# Altium PCB PCB1.PcbDoc
Units mil, origin at the board's own origin, x right, y up, seen from the top; angles counter-clockwise.
Board outline 6000 x 4000 mil, 2 copper layers (Top Layer, Bottom Layer); 25 components, 20 nets, 80 pads, 8 vias.
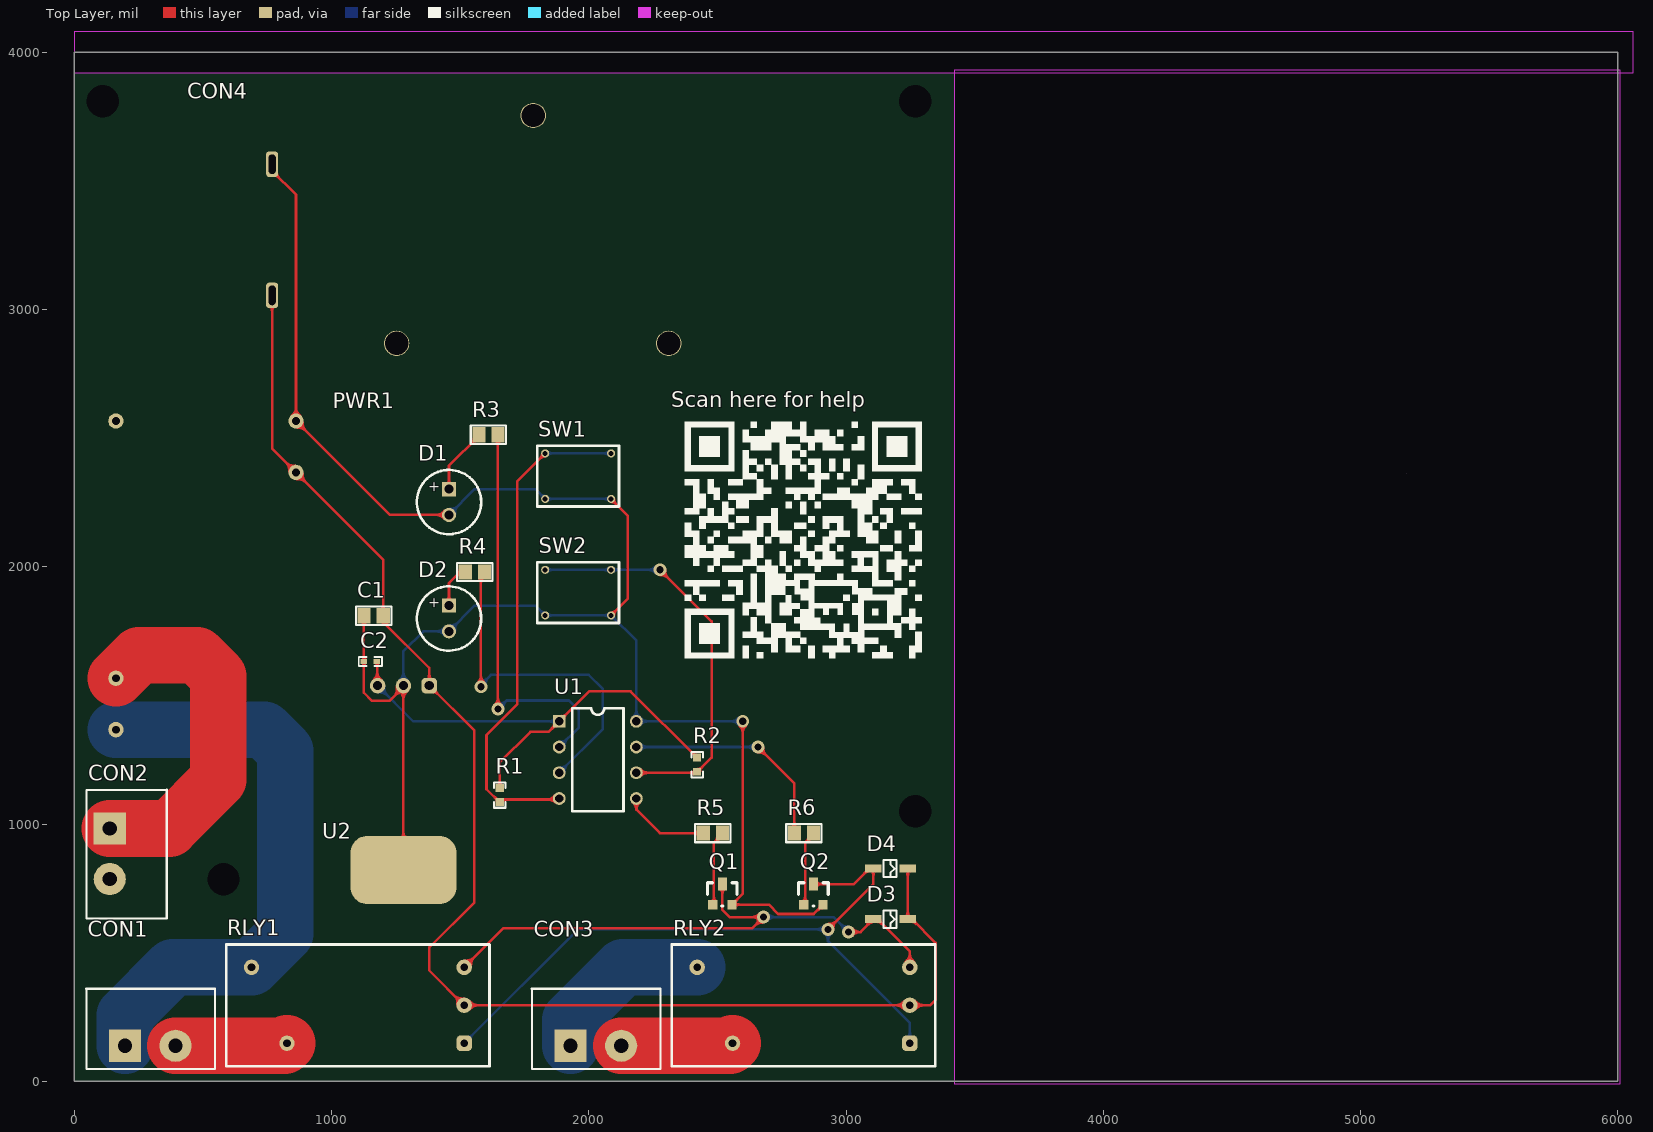
[diagram p0: Top Layer view]
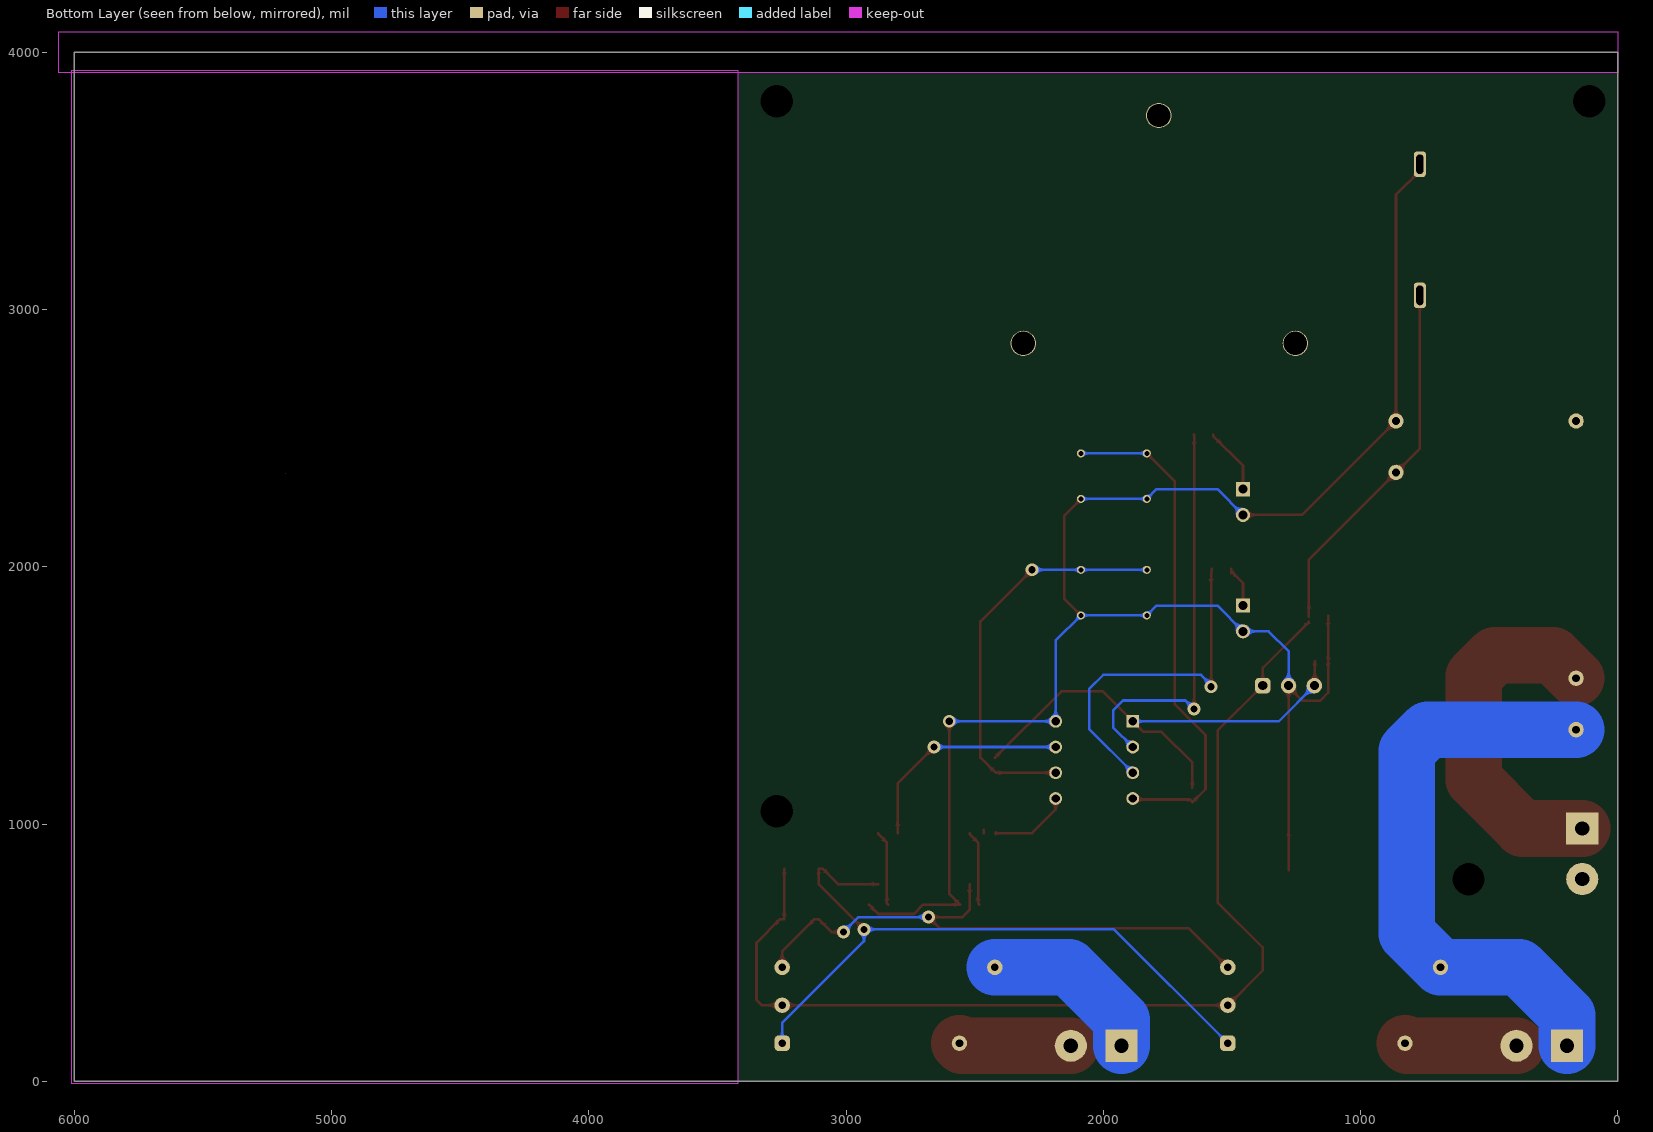
[diagram p1: Bottom Layer view, seen from below]
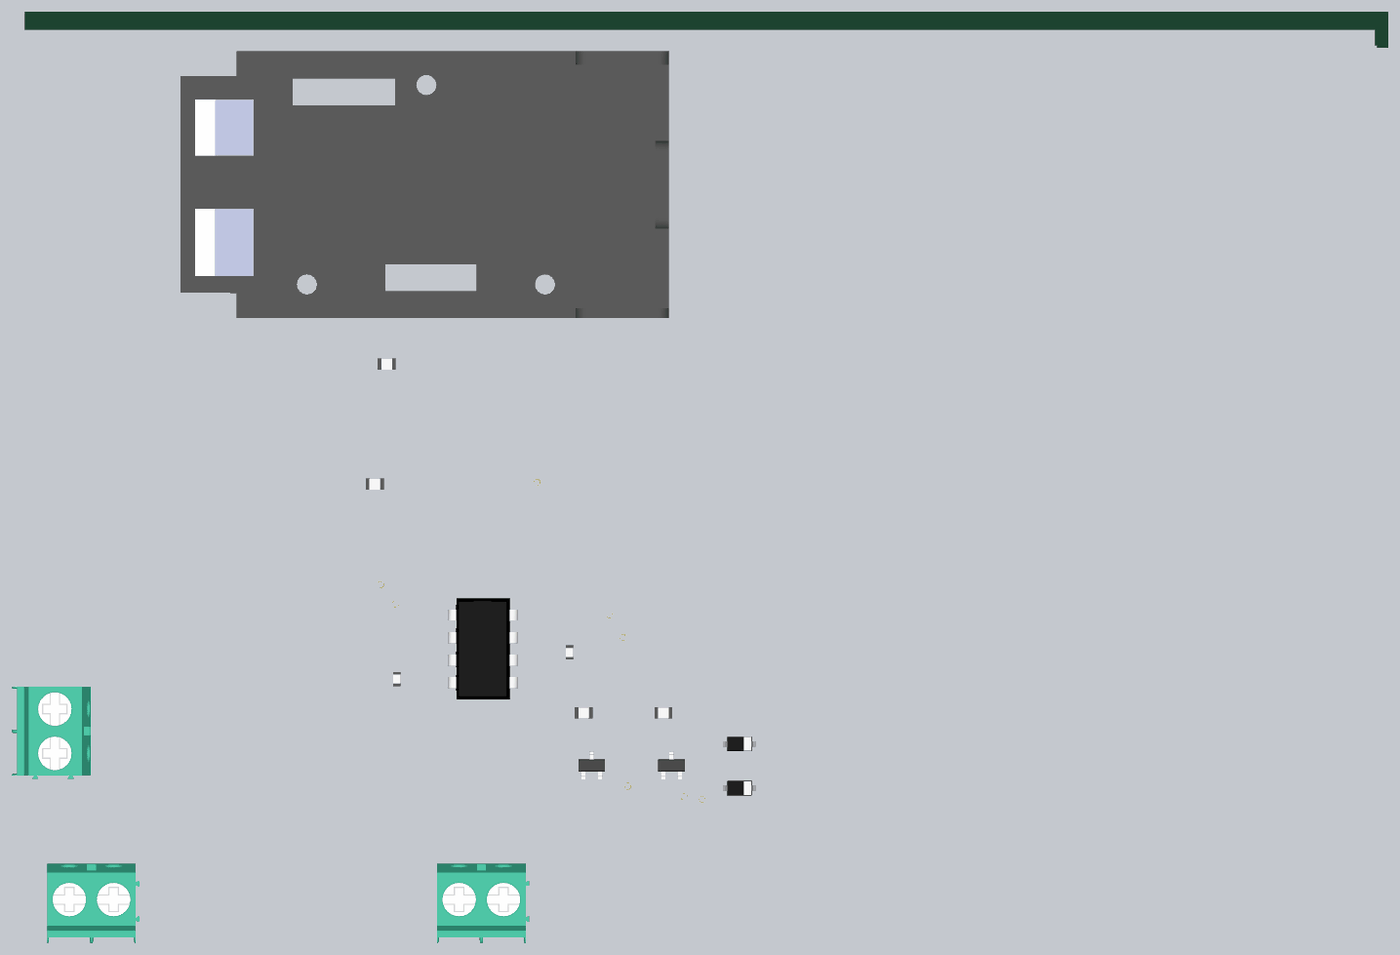
[diagram p2: 3D render of the assembled board from above, using the file's embedded part models]

## Layer stack, top to bottom
Top Solder: solder mask 0.4, Solder Resist, Dk 3.5
Top Layer: signal copper 1.4
Dielectric 1: dielectric 12.6, FR-4, Dk 4.8
Bottom Layer: signal copper 1.4
Bottom Solder: solder mask 0.4, Solder Resist, Dk 3.5

## Board outline
0,0 6000,0 6000,4000 0,4000
cut-out: 6060,3920 6060,4080 0,4080 0,3920
cut-out: 3420,-10 6010,-10 6010,3930 3420,3930
cut-out: 5177.17,2362.2

## Design rules (kind name [scope] priority, off if disabled: settings)
Clearance [All] p1: gap=10 ignorepadtopadclearanceinfootprint=FALSE except(0: Arc-Hole Track-Hole SMDPad-Hole THPad-Hole Via-Hole Fill-Hole Poly-Hole Region-Hole Text-Hole)
PolygonConnect [All] p1: connectstyle=Relief reliefconductorwidth=40 reliefentries=4 polygonreliefangle="90 Angle" airgapwidth=10
RoutingVias [All] p1: holewidth=28 width=50 viastyle="Through Hole" minholewidth=28 minwidth=50 maxholewidth=28 maxwidth=50
SilkToSolderMaskClearance [IsPad] p1: minsilkscreentomaskgap=1 clearancetoexposedcopper=TRUE
SolderMaskExpansion [All] p1: expansion=4
Width [All] p1: maxlimit=220.47 minlimit=10 preferedwidth=10 minimp=50.000000 maximp=50.000000 favimp=50.000000
29 further rules are at their usual default settings.

## Classes and differential pairs
component class Sheet1: C1 C2 CON1 CON2 CON3 D1 D2 D3 D4 Q1 Q2 R1 R2 R3 R4 R5 R6 RLY1 SW1 SW2 U1 U2

## Components (designator, comment, footprint, x,y, rotation, side; value= is the part's Value field where it differs from the comment)
C1 "0.33µF" 0805 1125.98,1809.45 r0 top
C2 "0.1µF" 0402_C 1125.98,1632.28 r0 top
CON1 "1935161" 5MM-CON-2 196.85,137.8 r90 top
CON2 "1935161" 5MM-CON-2 137.8,982.68 r0 top
CON3 "1935161" 5MM-CON-2 1929.13,137.8 r90 top
CON4 "BC9VPC" "9V BATTERY HOLDER" 1540,3310 r180 top
D1 "SSL-LX5093SRC/DV" RB-.1/.250 1456.69,2301.57 r0 top
D2 "SSL-LX5093SRC/DV" RB-.1/.250 1456.69,1848.82 r0 top
D3 "100V" SOD123 3106.3,629.92 r0 top
D4 "100V" SOD123 3106.3,826.77 r0 top
PWR1 "IRM-03-9" IRM-03-9 511.81,1966.62 r90 top
Q1 "2SD1048-6-TB-E" SOT-23 2481.69,686.46 r0 top
Q2 "2SD1048-6-TB-E" SOT-23 2836.02,686.46 r0 top
R1 "3.01k" 0603_R 1653.54,1085.16 r90 top
R2 "3.01k" 0603_R 2421.26,1203.26 r90 top
R3 "4.02k" 0805_R 1647.44,2512.99 r180 top
R4 "4.02k" 0805_R 1594.8,1980.02 r180 top
R5 "402" 0805_R 2444.88,964.57 r0 top
R6 "402" 0805_R 2799.21,964.57 r0 top
RLY1 "ADW1209HLW" "ADW1 LOW-PROFILE RELAY" 1102.36,295.28 r90 top
RLY2 "ADW1209HLW" "ADW1 LOW-PROFILE RELAY" 2834.65,295.28 r90 top
SW1 "1301.9302" "4 PIN SPST PUSH BUTTON" 1958.66,2352.36 r0 top
SW2 "1301.9302" "4 PIN SPST PUSH BUTTON" 1958.66,1899.61 r0 top
U1 "PIC12F683-I/P" DIP8 1885.04,1399.21 r0 top
U2 "L7805CP" L7805 1279.53,1179.53 r90 top

## Footprints (in the part's own frame and the unit in brackets; to place one, negate y for a bottom-side part, rotate by r counter-clockwise, add the part's x,y. Pads: shape width x height; smd on the part's side, far side on the other; paste and mask are expansions set on the pad)
"4 PIN SPST PUSH BUTTON" [mm]
  round 0.8 hole 0.5: 92(-3.25,2.25) 93(-3.25,-2.25) 94(3.25,-2.25) 95(3.25,2.25)
  silkscreen extent -4.04,-3 4.04,3
5MM-CON-2 [mm]
  rect 3.175x3.175 hole 1.4: 1(0,0)
  round 3.175 hole 1.4: 2(0,-5)
  silkscreen extent -2.29,-8.89 5.61,3.81, body extent -5.04,-7.94 3.96,2.46, height 11.5
"9V BATTERY HOLDER" [mm]
  rrect50% 1.2x2.5 hole 1.91 slot 0.7 at 0 deg: 85(19.58,-6.475) 86(19.58,6.475)
  round 2.5 hole 2.3: 87(-6.2,-11.285) 90(7.29,11.215) 91(-19.58,11.215)
  body extent -33.58,-15.09 21.54,15.04, height 21.46
0402_C [mil]
  rect 25x20 smd: 1(0,0) 2(50,0)
  silkscreen extent -20,-18 70,18, body extent -3,-10 53,10, height 20
0603_R [mil]
  rect 30x32 smd: 1(0,0) 2(55,0)
  silkscreen extent -22,-22 77,22, body extent -2,-17 60,17, height 19
0805 [mm]
  rect 1.3x1.5 smd: 1(0,0) 2(1.9,0)
  silkscreen extent -0.8,-0.9 2.7,0.9
0805_R [mm]
  rect 1.3x1.5 smd: 1(0,0) 2(1.9,0)
  silkscreen extent -0.8,-0.9 2.7,0.9, body extent -0.01,-0.64 1.99,0.62, height 0.43
"ADW1 LOW-PROFILE RELAY" [mil]
  rrect50% 60x60 hole 30: 1(-147.64,-413.39)
  round 60 hole 30: 2(0,-413.39) 3(147.64,-413.39) 4(-147.64,275.59) 5(147.64,413.39)
  silkscreen extent -236,-512 236,512, body extent -502,-494 224,494, height 622
DIP8 [mil]
  rect 50x50 hole 32: 1(0,0)
  round 50 hole 32: 2(0,-100) 3(0,-200) 4(0,-300) 5(300,-300) 6(300,-200) 7(300,-100) 8(300,0)
  silkscreen extent 50,-350 250,50, body extent -4,-376 306,74, height 165
IRM-03-9 [mil]
  round 60 hole 30: 1(-600,350) 2(-400,350) 3(600,350) 4(400,-350) 5(600,-350)
  body extent -743,-473 729,473, height 591
L7805 [mm]
  round 1.524 hole 0.9: 81(9.1,2.55) 82(9.1,0)
  rrect50% 1.524x1.524 hole 0.9: 83(9.1,-2.55)
  rrect50% 6.75x10.5 smd: 84(-9.1,0)
RB-.1/.250 [mil]
  rect 55x55 hole 35: 1(0,0)
  round 55 hole 35: 2(0,-100)
  silkscreen extent -125,-175 125,75
SOD123 [mm]
  rect 1.6x0.8 smd: 1(0,0) 2(3.4,0)
  silkscreen extent 1.02,-0.85 2.29,0.85, body extent -0.1,-0.81 3.6,0.79, height 1.27
SOT-23 [mil]
  rect 36x36 smd: 1(0,0) 2(75,0)
  rect 36x50 smd: 3(38,80)
  silkscreen extent -20,-5 95,85, body extent -21,-18 97,106, height 39

## Part data
C1: library part 4447, "CAP CER 0.33UF 25V 10% X7R 0805", Current Inventory=0, Manufacturer="AVX Corporation", Manufacturer Part Number=08053C334KAZ2A, Supplier Part Number 1=478-3556-1-ND, ComponentLink1Description="Datasheet Document", Cost 1pc=0.36, Cost 100pc=0.1568, Cost 1000pc=0.10304, Internal PN=4447, Parameters=25V, Part Category=Capacitors, Part Verified=False, Primary Vendor Stock=7252, RoHS Compliant=True, SLInvtID=PDI-04447, Supplier 1=Digi-Key
C2: library part 5433, "CAP CER 0.1UF 10V 10% X7R 0402", Current Inventory=0, Manufacturer="TDK Corporation", Manufacturer Part Number=C1005X7R1A104K, Supplier Part Number 1=445-4958-1-ND, ComponentLink1Description="Datasheet Document", Cost 1pc=0.1, Cost 100pc=0.0121, Cost 1000pc=0.0066, Internal PN=5433, Parameters=10V, Part Category=Capacitors, Part Verified=False, Primary Vendor Stock=617771, RoHS Compliant=True, SLInvtID=PDI-05433, Supplier 1=Digi-Key
CON1 CON2 CON3: library part 9497, "2 POSITION SCREW TERMINAL WIRE TO BOARD TERMINAL BLOCK HORIZONTAL WITH BOARD 0.197\" (5.00MM) THROUGH HOLE", Current Inventory=15956, Manufacturer="Phoenix Contact", Supplier Part Number 1=277-1667-ND, ComponentLink1Description="Datasheet Document", Cost 1pc=0.43, Cost 100pc=0.38, Cost 1000pc=0.3, Internal PN=9497, Manufacturer Part Number=1935161, Part Category=Connectors, Part Verified=False, Primary Vendor Stock=0, RoHS Compliant=False, SLInvtID=PDI-09497, Supplier 1=Digi-Key
CON4: library part 9498, "BATTERY HOLDER (OPEN) 9V 1 CELL PC PIN", Current Inventory=13655, Manufacturer=MPD, Supplier Part Number 1=BC9VPC-ND, ComponentLink1Description="Datasheet Document", Cost 1pc=1.98, Cost 100pc=1.38, Cost 1000pc=1.11, Internal PN=9498, Manufacturer Part Number=BC9VPC, Part Category=Connectors, Part Verified=False, Primary Vendor Stock=0, RoHS Compliant=False, SLInvtID=PDI-09498, Supplier 1=Digi-Key
D1 D2: library part 1335, "LED 5MM 1500MCD SUPER RED WTRCLR", Current Inventory=0, Manufacturer="Lumex Opto/Components Inc", Supplier Part Number 1=67-1610-ND, ComponentLink1Description="Datasheet Document", Cost 1pc=0.39, Cost 100pc=0.184, Cost 1000pc=0.092, Internal PN=1335, Manufacturer Part Number=SSL-LX5093SRC/DV, Part Category=Optoelectronics, Part Verified=False, Primary Vendor Stock=27040, RoHS Compliant=True, SLInvtID=PDI-01335, Supplier 1=Digi-Key
D3 D4: library part 9142, "DIODE GEN PURP 100V 200MA SOD123", Current Inventory=0, Manufacturer="ON Semiconductor", Manufacturer Part Number=MMSD914T1G, Supplier Part Number 1=MMSD914T1GOSCT-ND, ComponentLink1Description="Datasheet Document", Cost 1pc=0.2, Cost 100pc=0.0998, Cost 1000pc=0.04186, Internal PN=9142, Parameters=200mA, Part Category=Diodes, Part Verified=False, Primary Vendor Stock=0, RoHS Compliant=True, SLInvtID=PDI-09142, Supplier 1=Digi-Key
PWR1: library part 9501, "ENCLOSED AC DC CONVERTERS 1 UITGANG 9V    333MA 85 ~ 305 VAC, 120 ~ 430 VDC INPUT", Current Inventory=1855, Manufacturer="Mean Well", Supplier Part Number 1=1866-3022-ND, ComponentLink1Description="Datasheet Document", Cost 1pc=6.62, Cost 100pc=5.88, Cost 1000pc=5.88, Internal PN=9501, Manufacturer Part Number=IRM-03-9, Part Category="Power Supplies", Part Verified=False, Primary Vendor Stock=0, RoHS Compliant=False, SLInvtID=PDI-09501, Supplier 1=Digi-Key
Q1 Q2: library part 9500, "BIPOLAR (BJT) TRANSISTOR NPN 15V 700MA 250MHZ 200MW SURFACE MOUNT 3-CP", Current Inventory=8401, Manufacturer="ON Semiconductor", Supplier Part Number 1=2SD1048-6-TB-EOSCT-ND, ComponentLink1Description="Datasheet Document", Cost 1pc=0.37, Cost 100pc=0.13, Cost 1000pc=0.09, Internal PN=9500, Manufacturer Part Number=2SD1048-6-TB-E, Part Category="Discrete Semiconductor Products", Part Verified=False, Primary Vendor Stock=0, RoHS Compliant=False, SLInvtID=PDI-09500, Supplier 1=Digi-Key
R1 R2: library part 46, "RES SMD 3.01K OHM 1% 1/10W 0402", Current Inventory=0, Manufacturer="Panasonic Electronic Components", Manufacturer Part Number=ERJ-2RKF3011X, Supplier Part Number 1=P3.01KLCT-ND, ComponentLink1Description="Datasheet Document", Cost 1pc=0.1, Cost 100pc=0.011, Cost 1000pc=0.00496, Internal PN=46, Parameters=±1%, Part Category=Resistors, Part Verified=False, Primary Vendor Stock=256361, RoHS Compliant=True, SLInvtID=PDI-00046, Supplier 1=Digi-Key
R3 R4: library part 188, "RES 4.02K OHM 1/10W .5% 0805 SMD", Current Inventory=140, Manufacturer=Susumu, Manufacturer Part Number=RR1220P-4021-D-M, Supplier Part Number 1=RR12P4.02KDCT-ND, ComponentLink1Description="Datasheet Document", Cost 1pc=0.1, Cost 100pc=0.0358, Cost 1000pc=0.01575, Internal PN=188, Parameters=±0.5%, Part Category=Resistors, Part Verified=False, Primary Vendor Stock=42908, RoHS Compliant=True, SLInvtID=PDI-00188, Supplier 1=Digi-Key
R5 R6: library part 365, "RES 402 OHM 1/10W .1% 0805 SMD", Current Inventory=0, Manufacturer=Susumu, Manufacturer Part Number=RR1220P-4020-B-M-T5, Supplier Part Number 1="(obsolete) RR12P402BCT-ND", ComponentLink1Description="Datasheet Document", Cost 1pc=0, Cost 100pc=0, Cost 1000pc=0, Internal PN=365, Parameters=±0.1%, Part Category=Resistors, Part Verified=False, Primary Vendor Stock=0, RoHS Compliant=True, SLInvtID=PDI-00365, Supplier 1=Digi-Key
RLY1 RLY2: library part 9495, "GENERAL PURPOSE TWO-COIL RELAY SPST-NO (1 FORM A) 9VDC COIL THROUGH HOLE", Current Inventory=131, Manufacturer="Panasonic - ECG", Supplier Part Number 1=255-5339-ND, ComponentLink1Description="Datasheet Document", Cost 1pc=5.83, Cost 100pc=4.37, Cost 1000pc=3.4, Internal PN=9495, Manufacturer Part Number=ADW1209HLW, Part Category=Relays, Part Verified=False, Primary Vendor Stock=0, RoHS Compliant=False, SLInvtID=PDI-09495, Supplier 1=Digi-Key
SW1 SW2: library part 9499, "TACTILE SWITCH SPST-NO TOP ACTUATED THROUGH HOLE", Current Inventory=1762, Manufacturer="Schurter Inc.", Supplier Part Number 1=486-3458-ND, ComponentLink1Description="Datasheet Document", Cost 1pc=0.23, Cost 100pc=0.19, Cost 1000pc=0.19, Internal PN=9499, Manufacturer Part Number=1301.9302, Part Category=Switches, Part Verified=False, Primary Vendor Stock=0, RoHS Compliant=False, SLInvtID=PDI-09499, Supplier 1=Digi-Key
U1: library part 94, "IC MCU 8BIT 3.5KB FLASH 8DIP", Current Inventory=0, Manufacturer="Microchip Technology", Supplier Part Number 1=PIC12F683-I/P-ND, ComponentLink1Description="Datasheet Document", Cost 1pc=1.42, Cost 100pc=1.12, Cost 1000pc=1.12, Internal PN=94, Manufacturer Part Number=PIC12F683-I/P, Part Category="Integrated Circuits (ICs)", Part Verified=False, Primary Vendor Stock=6555, RoHS Compliant=True, SLInvtID=PDI-00094, Supplier 1=Digi-Key
U2: library part 2376, "IC REG LDO 5V 1.5A TO220FP", Current Inventory=0, Manufacturer=STMicroelectronics, Supplier Part Number 1=497-1442-5-ND, ComponentLink1Description="Datasheet Document", Cost 1pc=0.83, Cost 100pc=0.5589, Cost 1000pc=0.3312, Internal PN=2376, Manufacturer Part Number=L7805CP, Part Category="Integrated Circuits (ICs)", Part Verified=False, Primary Vendor Stock=3408, RoHS Compliant=True, SLInvtID=PDI-02376, Supplier 1=Digi-Key

## Free pads (board coordinates)
  round 60 hole 126 unplated: 103(109.84,3810) 103(580,785.83) 103(3270,1050) 103(3270,3810)

## Via types
v1: diameter 50, hole 28, Top Layer to Bottom Layer, 8 vias

## Nets (pads, with @x,y where several pads share a name; then routed paths per layer and width w, separated by ;. In a path a pad name is that pad's centre, name@x,y a point inside that pad or via, vN(x,y) a via of type N, cw(c..) or ccw(c..) an arc to the next point about the centre after c; other vN are vias at no path point)
+5V: C2.2 R1.2 R2.2 U1.1 U2.81 | length 1946.7
  Top Layer w10: C2.2 1177.56,1630.71 1177.56,1539.37 U2.81 ; R1.2 1653.54,1238.58 1773.23,1358.27 1844.09,1358.27 U1.1 2001.57,1515.75 2162.77,1515.75 2420.26,1258.26 R2.2
  Bottom Layer w10: U2.81 1317.72,1399.21 U1.1
+9V: C1.2 CON4.86 D3.2 D4.2 PWR1.4 RLY1.2 RLY2.2 U2.83 | length 5601.8
  Top Layer w10: CON4.86 769.13,2459.29 PWR1.4 1200.79,2027.64 C1.2 C1.2@1200.79,1805.51 ; C1.2@1200.79,1785.83 1379.92,1606.69 U2.83 ; U2.83@1381.5,1539.37 U2.83 ; D4.2 D3.2 3255.91,629.92 3347.83,537.99 3347.83,316.34 3326.77,295.28 RLY2.2 RLY1.2 1379.92,431.1 1379.92,519.92 1555.12,695.12 1555.12,1362.6 U2.83
btn_hours: R2.1 SW2.92 SW2.95 U1.6 | length 1575.7
  Top Layer w10: U1.6 2417.21,1199.21 R2.1 2422.26,1203.26 2477.36,1258.36 2477.36,1787.4 v1(2276.57,1988.19)
  Bottom Layer w10: SW2.92 SW2.95 v1(2276.57,1988.19)
btn_rst: R1.1 SW1.92 SW1.95 U1.4 | length 1965.2
  Top Layer w10: SW1.92 1721.65,2331.89 1721.65,1464.89 1602.56,1345.79 1602.56,1135.14 1652.54,1085.16 R1.1 1663.54,1095.16 1880.98,1095.16 U1.4
  Bottom Layer w10: SW1.92 SW1.95
GND: C1.1 C2.1 CON4.85 D1.2 D2.2 PWR1.5 Q1.2 Q2.2 SW1.93 SW1.94 SW2.93 SW2.94 U1.8 U2.82 U2.84 | length 7192.4
  Top Layer w10: CON4.85 769.13,3539.33 861.81,3446.65 PWR1.5 1226.85,2201.57 D1.2 ; C1.1 C2.1 1125.98,1510.24 1157.28,1478.95 1224.61,1478.95 U2.82@1279.53,1533.86 ; U2.84 U2.82@1279.53,1533.86 ; U2.82 U2.82@1279.53,1533.86 ; SW2.94 2152.17,1876.57 2152.17,2198.23 SW1.94 ; v1(2598.43,1399.21) 2598.43,728.2 Q1.2 2700,686.46 2736.46,650 2874.56,650 Q2.2
  Bottom Layer w10: U2.82 1279.53,1671.65 1356.69,1748.82 D2.2 1556.69,1848.82 1792.91,1848.82 SW2.93 SW2.94 2185.04,1712.6 U1.8 v1(2598.43,1399.21) ; D1.2 1556.69,2301.57 1792.91,2301.57 SW1.93 SW1.94
led_hours: R4.1 U1.3 | length 1367.5
  Top Layer w10: R4.1@1577.76,1991.93 1577.76,1983.17 1580.91,1980.02 v1(1580.91,1533.66)
  Bottom Layer w10: v1@1580.91,1541.14 1619.76,1580 2000,1580 2053.54,1526.46 2053.54,1367.72 U1.3
led_rst: R3.1 U1.2 | length 1584.5
  Top Layer w10: v1(1646.85,1446.65) 1646.85,2512.4 R3.1
  Bottom Layer w10: v1(1646.85,1446.65) 1680.2,1480 1922.36,1480 1961.42,1440.94 1961.42,1375.59 U1.2
NetD1_1: D1.1 R3.2 | length 259.4
  Top Layer w10: D1.1 1456.69,2393.11 1572.64,2509.06 R3.2
NetD2_1: D2.1 R4.2 | length 171
  Top Layer w10: D2.1 1456.69,1936.91 R4.2@1502.95,1983.17 ; R4.2@1502.95,1974.41 R4.2@1502.95,1983.17 ; R4.2@1502.95,1991.93 R4.2@1502.95,1983.17
NetQ1_B: Q1.1 R5.2 | length 293.9
  Top Layer w10: Q1.1 2486.69,691.46 2486.69,927.63 2519.69,960.63 R5.2
NetQ2_B: Q2.1 R6.2 | length 293.9
  Top Layer w10: Q2.1 2841.02,691.46 2841.02,927.63 2874.02,960.63 R6.2
Neutral: CON2.1 PWR1.2 | length 1371.6
  Top Layer w220.47: CON2.1 370.08,982.68 560,1172.6 560,1573.94 477.76,1656.18 251.38,1656.18 PWR1.2
Pump_In_1: CON1.1 PWR1.1 RLY1.5 | length 2338.2
  Bottom Layer w10: CON1.1@174.8,126.57 CON1.1@174.8,188.07
  Bottom Layer w220.47: PWR1.1 738.58,1366.62 820,1285.2 820,573.94 RLY1.5 382.91,442.91 196.85,256.85 CON1.1
Pump_In_2: CON3.1 RLY2.5 | length 739.4
  Bottom Layer w10: CON3.1@1908.47,128.74 CON3.1@1908.47,190.24
  Bottom Layer w220.47: CON3.1 1929.13,239.13 2132.91,442.91 RLY2.5
Pump_Out_1: CON1.2 RLY1.4 | length 437.1
  Top Layer w220.47: CON1.2 816.93,137.8 RLY1.4
Pump_Out_2: CON3.2 RLY2.4 | length 437.1
  Top Layer w220.47: CON3.2 2549.21,137.8 RLY2.4
Relays_off: R5.1 U1.5 | length 328.7
  Top Layer w10: U1.5 2185.04,1056.1 2276.57,964.57 R5.1@2420.53,964.57 ; R5.1@2464.88,964.57 R5.1@2464.88,976.79
Relays_on: R6.1 U1.7 | length 865.8
  Top Layer w10: v1(2657.48,1299.21) 2799.21,1157.48 R6.1
  Bottom Layer w10: U1.7 v1(2657.48,1299.21)
Reset: D3.1 Q1.3 RLY1.3 RLY2.3 | length 2242.9
  Top Layer w10: RLY1.3 1666.73,593.9 2635.43,593.9 v1(2679.72,638.19) 2547.74,638.19 2519.49,666.44 Q1.3@2519.49,766.26 ; v1(3010,580) 3056.38,580 D3.1 3122.05,629.92 3248.03,503.94 RLY2.3
  Bottom Layer w10: v1(2679.72,638.19) 2951.81,638.19 v1(3010,580)
Set: D4.1 Q2.3 RLY1.1 RLY2.1 | length 2738.8
  Top Layer w10: Q2.3 3030.24,766.46 3090.55,826.77 D4.1 3106.3,766.74 v1(2929.92,590.36)
  Bottom Layer w10: RLY1.1 1958.47,590.36 v1(2929.92,590.36) 2929.92,544.49 3248.03,226.38 RLY2.1
pads on no net: CON2.2 CON4.87 CON4.90 CON4.91 PWR1.3

## Polygon pours and split planes (outlines as drawn)
Pump_In_1 on Top Layer "Top Layer-Pump_In_1" (solid, pour order 8): 535,240

## Silkscreen, mask and mechanical layers (free items; w line width, h text height)
Top Overlay:
  drawing of 69 lines, arcs and shapes, not listed
  text "Scan here for help" at 2320,2620 h60
Mechanical 1:
  lines w10: 0,0 3420,0 3420,3920 0,3920 0,0

## Text inside footprints (layer, text, board x,y; h text height)
D1: Top Overlay "+" at 1416.69,2288.57 h40 r90
D2: Top Overlay "+" at 1416.69,1835.82 h40 r90